# Altium PCB BEE-1012 PAY-IF V1.0.0.PcbDoc (part 3 of 3)
Units mm, origin at the board's own origin, x right, y up, seen from the top; angles counter-clockwise.
Board outline 93 x 90 mm, 8 copper layers (Top Layer, GND_Plane_2, Signal_3, Power_Plane, GND_Plane_5, Signal_6, GND_Plane_7, Bottom Layer), stack 1.672 mm thick; 514 components, 368 nets, 2268 pads, 326 vias.
Unrouted connection lines stored in the file: 1343.
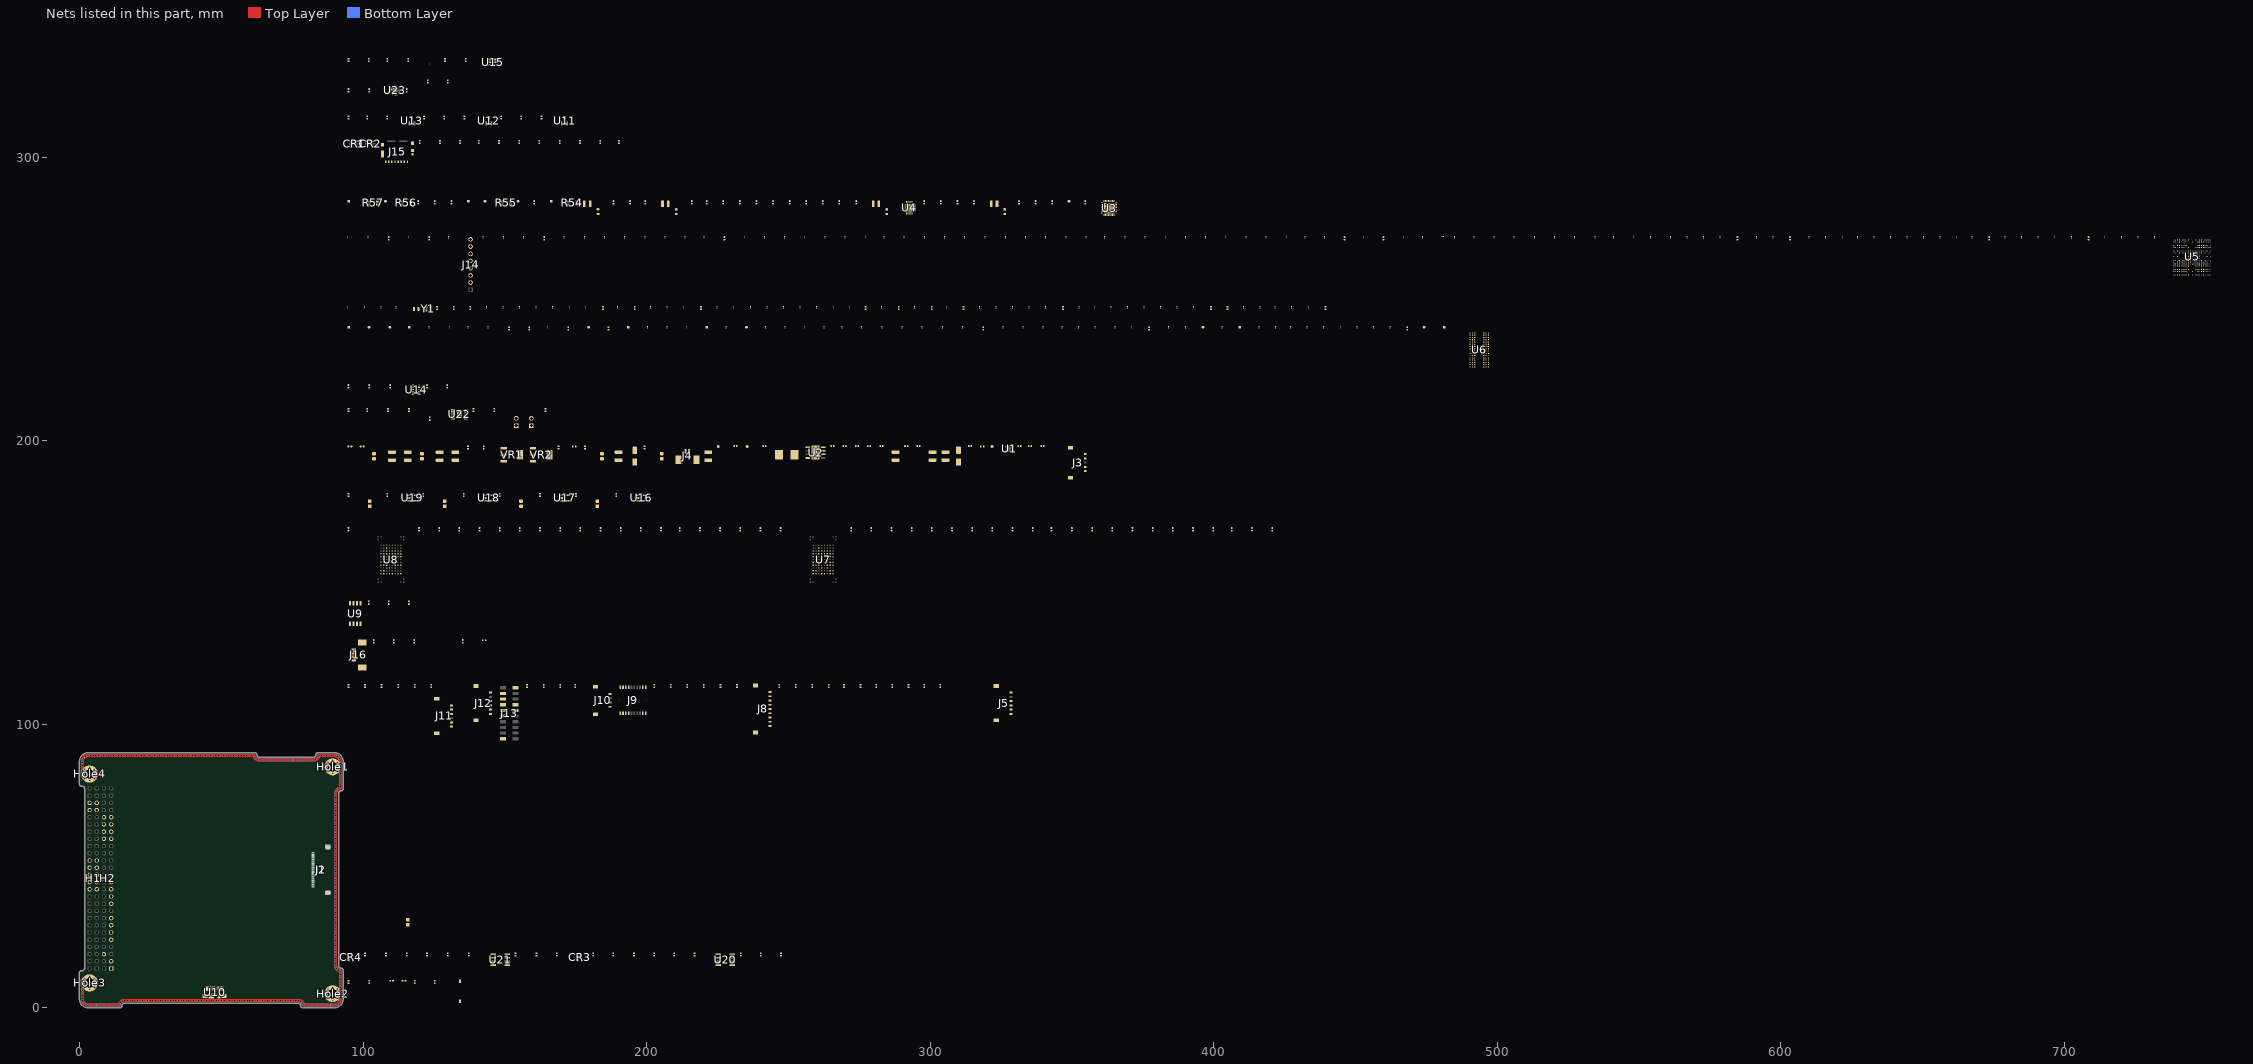
[diagram p6: the nets of this part, all layers, seen from the top]

## Via types
v1: diameter 0.4, hole 0.2, Top Layer to Bottom Layer, 316 vias
v2: diameter 0.4, hole 0.2, Top Layer to Bottom Layer, tented both sides, 9 vias
v3: diameter 0.4, hole 0.4, Top Layer to Bottom Layer, 1 vias

## Nets (pads, with @x,y where several pads share a name; then routed paths per layer and width w, separated by ;. In a path a pad name is that pad's centre, name@x,y a point inside that pad or via, vN(x,y) a via of type N, cw(c..) or ccw(c..) an arc to the next point about the centre after c; other vN are vias at no path point) (continued)
SDMMC1_D3: R110.2 R186.2 U8.N3@107.355,154.115
SDMMC1_NRST: R98.2 R189.2 U8.M5@109.355,155.115
SDMMC2_CAL: R66.2 U5.E14
SENSE1_N: R54.4 U4.12
SENSE1_P: R54.3 U4.11
SENSE2_N: R55.4 U4.14
SENSE2_P: R55.3 U4.13
SENSE3_N: R56.4 U4.7
SENSE3_P: R56.3 U4.8
SENSE4_N: R57.4 U4.9
SENSE4_P: R57.3 U4.10
SHDN: R43.1 U5.B4
SPI_CLK_EXP: J2.4 R20.1 R37.1
SPI_CS_EXP: J2.2 R19.1 R36.1
SPI_MISO_EXP: J2.3 R22.1 R40.1
SPI_MOSI_EXP: J2.1 R21.1 R39.1
STX_12V: H1.23 H1.24
STX_GPIO: R14.2 R94.2
USB_CONNECTOR_N: J10.2 R33.2 U23.11
USB_CONNECTOR_P: J10.3 R34.2 U23.12
USB_DEBUG_N: U10.2 U23.14
USB_DEBUG_P: U10.3 U23.13
USBA_N: U5.F1 U23.3
USBA_P: U5.F2 U23.2
VBUS: D7.2 U10.1
VBUS/EN: J10.1
VDDBU: C78.2 R46.2 R61.2 R68.2 U5.E8
VDDCORE: C43.2 C44.2 C45.2 C46.2 C47.2 C49.2 C50.2 C51.2 C52.2 C53.2 C54.2 C55.2 C56.2 C57.2 C58.2 C59.2 R56.2 TP9.0 U5.B2 U5.F6 U5.F15 U5.H3 U5.J9 U5.J13 U5.J16 U5.N13 U5.N16 U5.T15 U5.U16 U5.U17 U5.U19 U5.V19
VDDCPU: C37.2 C38.2 C39.2 C40.2 C41.2 C42.2 R57.2 TP10.0 U5.B20 U5.E16 U5.E17 U5.E19 U5.F17
VDDIODDR: C83.1 C84.1 C85.1 C86.1 C87.1 C88.1 C89.1 C90.1 C91.1 C92.1 C93.1 C94.1 C95.1 C96.1 C97.1 C98.1 C99.1 C101.1 C102.1 C103.1 C104.2 C105.2 C106.2 C107.2 C108.2 C109.2 C110.2 C111.2 C112.2 C113.2 C114.2 C115.2 C116.2 C117.2 C118.2 C119.2 C120.2 C121.2 R55.2 R167.2 R169.2 TP7.0 U5.AA5 U5.M11 U5.N6 U5.N9 U5.N12 U5.P3 U5.P13 U5.T6 U5.T7 U5.T9 U5.U3 U5.U5 U5.U6 U5.W8 U5.Y2 U6.A1 U6.A8 U6.B2 U6.C1 U6.C9 U6.D2 U6.D9 U6.E9 U6.F1 U6.G7 U6.H2 U6.H9 U6.K2 U6.K8 U6.N1 U6.N9 U6.R1 U6.R9
VDDOUT25: C71.2 C72.2 C73.2 C74.2 C75.2 C76.2 C77.2 U5.D2 U5.E3 U5.E5 U5.J6 U5.T16 U5.W11 U5.W14
VLDO1: C35.2 TP6.0 U3.19
VLDO2: C36.2 TP8.0 U3.21
WKUP: R46.1 U3.7 U5.A8
XIN24M: C79.1 R69.2 U5.B7 Y1.1
XIN32K: C81.1 R70.2 U5.A9 Y2.1
XOUT24M: C80.1 R69.1 U5.A7 Y1.3
XOUT32K: C82.1 R70.1 U5.B9 Y2.2
pads on no net: CR1.1 CR2.3 H1.01 H1.02 H1.03 H1.04 H1.05 H1.06 H1.07 H1.08 H1.09 H1.10 H1.11 H1.12 H1.13 H1.14 H1.15 H1.16 H1.17 H1.18 H1.19 H1.20 H1.21 H1.22 H1.33 H1.34 H1.35 H1.36 H1.37 H1.38 H1.39 H1.40 H1.41 H1.42 H1.43 H1.44 H1.49 H1.50 H1.51 H1.52 H2.02 H2.04 H2.05 H2.07 H2.08 H2.10 H2.12 H2.14 H2.16 H2.17 H2.18 H2.20 H2.22 H2.24 H2.26 H2.27 H2.28 H2.29 H2.30 H2.31 H2.32 H2.33 H2.34 H2.35 H2.36 H2.45 H2.46 H2.47 H2.48 H2.49 H2.50 H2.51 H2.52 J3.3 J5.2 J9. J9.09 J9.10 J9.11 J9.12 J9.13 J9.14 J9.15 J9.16 J11.4 J12.2 J13. J13.1 J13.3 J13.4 J13.5 J13.6 J13.7 J13.8 J13.9 J13.15 J13.17 J13.20 J14.1 J15.14 J15.15 U2.2 U2.3 U2.5 U3.17 U5.A2 U5.A4 U5.A18 U5.A19 U5.AA15 U5.AA16 U5.AA18 U5.AA19 U5.B1 U5.C3 U5.C5 U5.C6 U5.C8 U5.C18 U5.C19 U5.C21 U5.D5 U5.D6 U5.D8 U5.D19 U5.D20 U5.D21 U5.E6 U5.F3 U5.F7 U5.F8 U5.F19 U5.G3 U5.G4 U5.G12 U5.G18 U5.G19 U5.G20 U5.H4 U5.H6 U5.H7 U5.H12 U5.H15 U5.H17 U5.H18 U5.J1 U5.J2 U5.J8 U5.J14 U5.J15 U5.J20 U5.J21 U5.K8 U5.K9 U5.K10 U5.K12 U5.L14 U5.M10 U5.M12 U5.M14 U5.M15 U5.N11 U5.N15 U5.N20 U5.N21 U5.P11 U5.R10 U5.R20 U5.R21 U5.T20 U5.T21 U5.V15 U5.V20 U5.V21 U5.W15 U5.W18 U5.W20 U5.W21 U5.Y13 U5.Y15 U5.Y18 U5.Y19 U5.Y20 U5.Y21 U6.J1 U6.J9 U6.L1 U6.L9 U7.A1 U7.A2 U7.A9 U7.A10 U7.B1 U7.B10 U7.D2 U7.D3 U7.D4 U7.D5 U7.D6 U7.D7 U7.D8 U7.D9 U7.E2 U7.E3 U7.E4@260.755,162.115 U7.E5 U7.E6 U7.E7 U7.E8 U7.E9 U7.F2@258.755,161.115 U7.F3@259.755,161.115 U7.F4@260.755,161.115 U7.F5@261.755,161.115 U7.F6@262.755,161.115 U7.F7@263.755,161.115 U7.F8@264.755,161.115 U7.F9@265.755,161.115 U7.G2@258.755,160.115 U7.G3@259.755,160.115 U7.G4@260.755,160.115 U7.G5@261.755,160.115 U7.G6@262.755,160.115 U7.G7@263.755,160.115 U7.G8@264.755,160.115 U7.G9@265.755,160.115 U7.H2@258.755,159.115 U7.H3@259.755,159.115 U7.H4 U7.H5 U7.H6 U7.H7 U7.H8@264.755,159.115 U7.H9@265.755,159.115 U7.J2 U7.J3 U7.J4 U7.J5@261.755,158.115 U7.J6 U7.J7 U7.J8 U7.J9 U7.K2@258.755,157.115 U7.K3@259.755,157.115 U7.K4 U7.K5@261.755,157.115 U7.K6 U7.K7 U7.K8@264.755,157.115 U7.K9@265.755,157.115 U7.L2@258.755,156.115 U7.L3@259.755,156.115 U7.L4@260.755,156.115 U7.L5 U7.L6 U7.L7@263.755,156.115 U7.L8@264.755,156.115 U7.L9@265.755,156.115 U7.M2 U7.M3 U7.M4@260.755,155.115 U7.M5@261.755,155.115 U7.M6 U7.M7@263.755,155.115 U7.M8 U7.M9 U7.N2@258.755,154.115 U7.N3@259.755,154.115 U7.N4 U7.N5 U7.N6 U7.N7 U7.N8@264.755,154.115 U7.N9@265.755,154.115 U7.P2@258.755,153.115 U7.P3@259.755,153.115 U7.P4 U7.P5@261.755,153.115 U7.P6@262.755,153.115 U7.P7 U7.P8@264.755,153.115 U7.P9@265.755,153.115 U7.T1 U7.T10 U7.U1 U7.U2 U7.U9 U7.U10 U8.A1 U8.A2 U8.A9 U8.A10 U8.B1 U8.B10 U8.D2 U8.D3 U8.D4 U8.D5 U8.D6 U8.D7 U8.D8 U8.D9 U8.E2 U8.E3 U8.E4@108.355,162.115 U8.E5 U8.E6 U8.E7 U8.E8 U8.E9 U8.F2@106.355,161.115 U8.F3@107.355,161.115 U8.F4@108.355,161.115 U8.F5@109.355,161.115 U8.F6@110.355,161.115 U8.F7@111.355,161.115 U8.F8@112.355,161.115 U8.F9@113.355,161.115 U8.G2@106.355,160.115 U8.G3@107.355,160.115 U8.G4@108.355,160.115 U8.G5@109.355,160.115 U8.G6@110.355,160.115 U8.G7@111.355,160.115 U8.G8@112.355,160.115 U8.G9@113.355,160.115 U8.H2@106.355,159.115 U8.H3@107.355,159.115 U8.H4 U8.H5 U8.H6 U8.H7 U8.H8@112.355,159.115 U8.H9@113.355,159.115 U8.J2 U8.J3 U8.J4 U8.J5@109.355,158.115 U8.J6 U8.J7 U8.J8 U8.J9 U8.K2@106.355,157.115 U8.K3@107.355,157.115 U8.K4 U8.K5 U8.K6 U8.K7 U8.K8 U8.K9 U8.L2@106.355,156.115 U8.L3@107.355,156.115 U8.L4@108.355,156.115 U8.L5 U8.L6 U8.L7@111.355,156.115 U8.L8@112.355,156.115 U8.L9@113.355,156.115 U8.M2 U8.M3 U8.M4@108.355,155.115 U8.M5@109.355,155.115 U8.M6 U8.M7@111.355,155.115 U8.M8 U8.M9 U8.N2@106.355,154.115 U8.N3@107.355,154.115 U8.N4 U8.N5 U8.N6 U8.N7 U8.N8 U8.N9 U8.P2@106.355,153.115 U8.P3@107.355,153.115 U8.P4 U8.P5@109.355,153.115 U8.P6@110.355,153.115 U8.P7 U8.P8@112.355,153.115 U8.P9@113.355,153.115 U8.T1 U8.T10 U8.U1 U8.U2 U8.U9 U8.U10 U10.4 U14.8 U14.10 U23.7 U23.8 U23.9 U23.10 U23.16

## Polygon pours and split planes (outlines as drawn)
no net on GND_Plane_2 (split plane): 330 vertices, not listed, extent 0.509,0.509 92.491,89.491
no net on Power_Plane (split plane): 330 vertices, not listed, extent 0.509,0.509 92.491,89.491
no net on GND_Plane_5 (split plane): 330 vertices, not listed, extent 0.509,0.509 92.491,89.491
no net on GND_Plane_7 (split plane): 330 vertices, not listed, extent 0.509,0.509 92.491,89.491

## Keep-outs
Keep-Out Layer:
  lines w0.1: 1.8,77.35 1.8,13.93 cw(c1,13.93) 1,13.13 0.8,13.13 ccw(c0.8,12.33) 0,12.33 0,3.2 ccw(c3.2,3.2) 3.2,0 14.2,0 ccw(c14.2,0.8) 15,0.8 cw(c15.8,0.8) 15.8,1.6 51,1.6 67.5,1.6 77.2,1.6 cw(c77.2,0.8) 78,0.8 ccw(c78.8,0.8) 78.8,0 89.8,0 ccw(c89.8,3.2) 93,3.2 93,13.2 ccw(c92.2,13.2) 92.2,14 cw(c92.2,14.8) 91.4,14.8 ; 1.8,77.35 ccw(c1,77.35) 1,78.15 0.8,78.15 cw(c0.8,78.95) 0,78.95 0,86.8 cw(c3.2,86.8) 3.193,90 ; 3.2,90 61.8,90 cw(c61.8,89.2) 62.6,89.2 ccw(c63.4,89.2) 63.4,88.4 82.6,88.4 ccw(c82.6,89.2) 83.4,89.2 cw(c84.2,89.2) 84.2,90 89.8,90 ; 89.807,90 cw(c89.8,86.8) 93,86.807 93,77.307 cw(c92.2,77.307) 92.2,76.507 ccw(c92.2,75.707) 91.4,75.707 ; 91.4,14.8 91.4,75.707

## Text inside footprints (layer, text, board x,y; h text height)
C38: Top Courtyard "C" at 433.424,247.067 h0.2 r90
C39: Top Courtyard "C" at 427.582,247.067 h0.2 r90
C40: Top Courtyard "C" at 421.74,247.067 h0.2 r90
C41: Top Courtyard "C" at 416.406,247.067 h0.2 r90
C42: Top Courtyard "C" at 410.564,247.067 h0.2 r90
C44: Top Courtyard "C" at 393.038,247.067 h0.2 r90
C45: Top Courtyard "C" at 387.196,247.067 h0.2 r90
C46: Top Courtyard "C" at 381.354,247.067 h0.2 r90
C47: Top Courtyard "C" at 375.512,247.067 h0.2 r90
C48: Top Courtyard "C" at 363.828,247.067 h0.2 r90
C49: Top Courtyard "C" at 369.67,247.067 h0.2 r90
C50: Top Courtyard "C" at 357.986,247.067 h0.2 r90
C51: Top Courtyard "C" at 352.652,247.067 h0.2 r90
C52: Top Courtyard "C" at 340.841,247.067 h0.2 r90
C53: Top Courtyard "C" at 334.999,247.067 h0.2 r90
C54: Top Courtyard "C" at 329.157,247.067 h0.2 r90
C55: Top Courtyard "C" at 323.315,247.067 h0.2 r90
C56: Top Courtyard "C" at 317.473,247.067 h0.2 r90
C57: Top Courtyard "C" at 305.789,247.067 h0.2 r90
C58: Top Courtyard "C" at 294.613,247.067 h0.2 r90
C60: Top Courtyard "C" at 282.929,247.067 h0.2 r90
C61: Top Courtyard "C" at 271.753,247.067 h0.2 r90
C62: Top Courtyard "C" at 265.911,247.067 h0.2 r90
C63: Top Courtyard "C" at 254.227,247.067 h0.2 r90
C64: Top Courtyard "C" at 236.701,247.067 h0.2 r90
C65: Top Courtyard "C" at 224.89,247.067 h0.2 r90
C66: Top Courtyard "C" at 213.206,247.067 h0.2 r90
C67: Top Courtyard "C" at 207.364,247.067 h0.2 r90
C68: Top Courtyard "C" at 201.522,247.067 h0.2 r90
C70: Top Courtyard "C" at 189.838,247.067 h0.2 r90
C72: Top Courtyard "C" at 178.662,247.067 h0.2 r90
C73: Top Courtyard "C" at 172.82,247.067 h0.2 r90
C74: Top Courtyard "C" at 166.978,247.067 h0.2 r90
C75: Top Courtyard "C" at 161.136,247.067 h0.2 r90
C76: Top Courtyard "C" at 155.294,247.067 h0.2 r90
C77: Top Courtyard "C" at 149.452,247.067 h0.2 r90
C78: Top Courtyard "C" at 143.61,247.067 h0.2 r90
C79: Top Courtyard "C" at 94.715,247.067 h0.2 r90
C80: Top Courtyard "C" at 100.557,247.067 h0.2 r90
C81: Top Courtyard "C" at 106.399,247.067 h0.2 r90
C82: Top Courtyard "C" at 111.733,247.067 h0.2 r90
C84: Top Courtyard "C" at 462.253,239.955 h0.2 r90
C85: Top Courtyard "C" at 456.411,239.955 h0.2 r90
C86: Top Courtyard "C" at 450.569,239.955 h0.2 r90
C87: Top Courtyard "C" at 444.727,239.955 h0.2 r90
C88: Top Courtyard "C" at 438.885,239.955 h0.2 r90
C89: Top Courtyard "C" at 433.043,239.955 h0.2 r90
C90: Top Courtyard "C" at 427.201,239.955 h0.2 r90
C91: Top Courtyard "C" at 421.867,239.955 h0.2 r90
C92: Top Courtyard "C" at 416.025,239.955 h0.2 r90
C93: Top Courtyard "C" at 403.071,239.955 h0.2 r90
C94: Top Courtyard "C" at 390.117,239.955 h0.2 r90
C95: Top Courtyard "C" at 384.148,239.955 h0.2 r90
C96: Top Courtyard "C" at 371.194,239.955 h0.2 r90
C97: Top Courtyard "C" at 365.352,239.955 h0.2 r90
C98: Top Courtyard "C" at 352.398,239.955 h0.2 r90
C99: Top Courtyard "C" at 346.556,239.955 h0.2 r90
C100: Top Courtyard "C" at 332.84,239.955 h0.2 r90
C101: Top Courtyard "C" at 339.952,239.955 h0.2 r90
C102: Top Courtyard "C" at 325.728,239.955 h0.2 r90
C104: Top Courtyard "C" at 311.504,239.955 h0.2 r90
C105: Top Courtyard "C" at 304.392,239.955 h0.2 r90
C106: Top Courtyard "C" at 297.28,239.955 h0.2 r90
C107: Top Courtyard "C" at 290.168,239.955 h0.2 r90
C108: Top Courtyard "C" at 283.056,239.955 h0.2 r90
C109: Top Courtyard "C" at 275.944,239.955 h0.2 r90
C110: Top Courtyard "C" at 269.086,239.955 h0.2 r90
C111: Top Courtyard "C" at 262.736,239.955 h0.2 r90
C112: Top Courtyard "C" at 255.878,239.955 h0.2 r90
C113: Top Courtyard "C" at 248.893,239.955 h0.2 r90
C114: Top Courtyard "C" at 242.035,239.955 h0.2 r90
C115: Top Courtyard "C" at 228.065,239.955 h0.2 r90
C116: Top Courtyard "C" at 214.095,239.955 h0.2 r90
C117: Top Courtyard "C" at 207.237,239.955 h0.2 r90
C118: Top Courtyard "C" at 200.379,239.955 h0.2 r90
C120: Top Courtyard "C" at 165.073,239.955 h0.2 r90
C122: Top Courtyard "C" at 144.245,239.955 h0.2 r90
C123: Top Courtyard "C" at 137.133,239.955 h0.2 r90
C124: Top Courtyard "C" at 123.417,239.955 h0.2 r90
U3: Top Assembly "1" at 360.807,283.972 h0.76 r270
U5: Top Assembly "A1" at 738.309,270.747 h1
U6: Top Overlay "9" at 497.484,239.712 h1 r90; Top Overlay "1" at 491.084,239.712 h1 r90; Top Overlay "T" at 487.324,225.394 h1; Top Overlay "A" at 487.324,237.394 h1; Mechanical 13 "9" at 497.484,239.712 h1.27 r90; Mechanical 13 "1" at 491.084,239.712 h1.27 r90; Mechanical 13 "T" at 487.324,225.394 h1.27; Mechanical 13 "A" at 487.324,237.394 h1.27
U7: Top Overlay "10" at 267.455,167.315 h1.27 r90; Top Overlay "1" at 258.355,167.515 h1.27 r90; Top Overlay "U" at 254.255,149.315 h1.27; Top Overlay "A" at 254.155,165.615 h1.27; Top Assembly "10" at 267.39,167.805 h1.27 r90; Top Assembly "1" at 258.39,167.805 h1.27 r90; Top Assembly "U" at 253.936,149.48 h1.27; Top Assembly "A" at 253.936,165.48 h1.27
U8: Top Overlay "10" at 115.055,167.315 h1.27 r90; Top Overlay "1" at 105.955,167.515 h1.27 r90; Top Overlay "U" at 101.855,149.315 h1.27; Top Overlay "A" at 101.755,165.615 h1.27; Top Assembly "10" at 114.99,167.805 h1.27 r90; Top Assembly "1" at 105.99,167.805 h1.27 r90; Top Assembly "U" at 101.536,149.48 h1.27; Top Assembly "A" at 101.536,165.48 h1.27
U22: Mechanical 13 "*" at 132.499,210.147 h1.27